# Altium PCB STM32_FYP_ADC_Module.PcbDoc
Units mm, origin at the board's own origin, x right, y up, seen from the top; angles counter-clockwise.
Board outline 70 x 32 mm, 2 copper layers (Top Layer, Bottom Layer); 12 components, 26 nets, 80 pads, 134 vias.
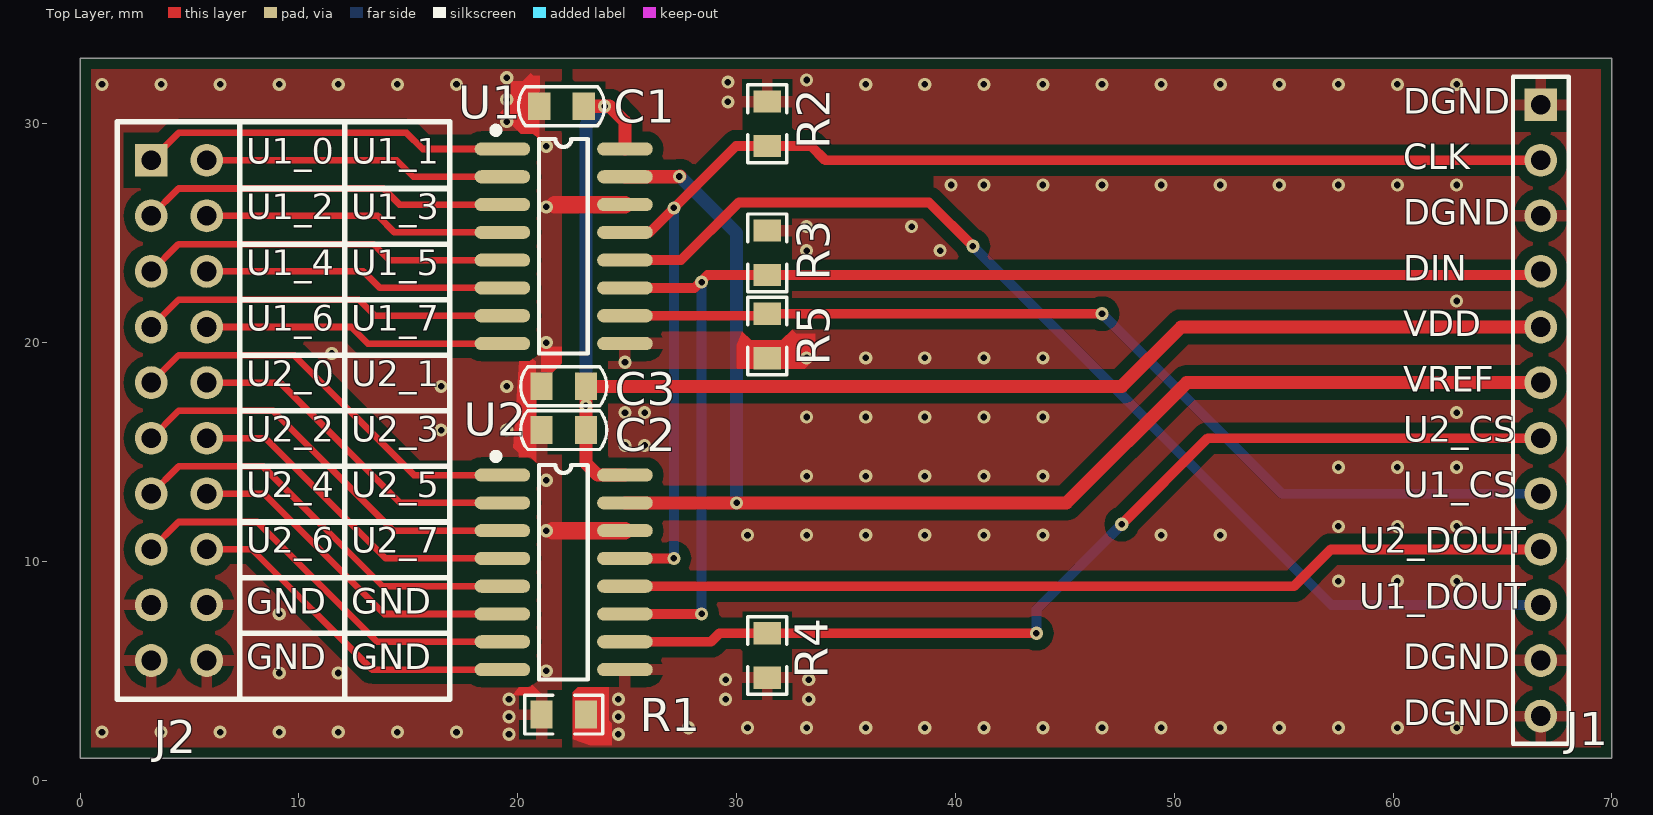
[diagram p0: Top Layer view]
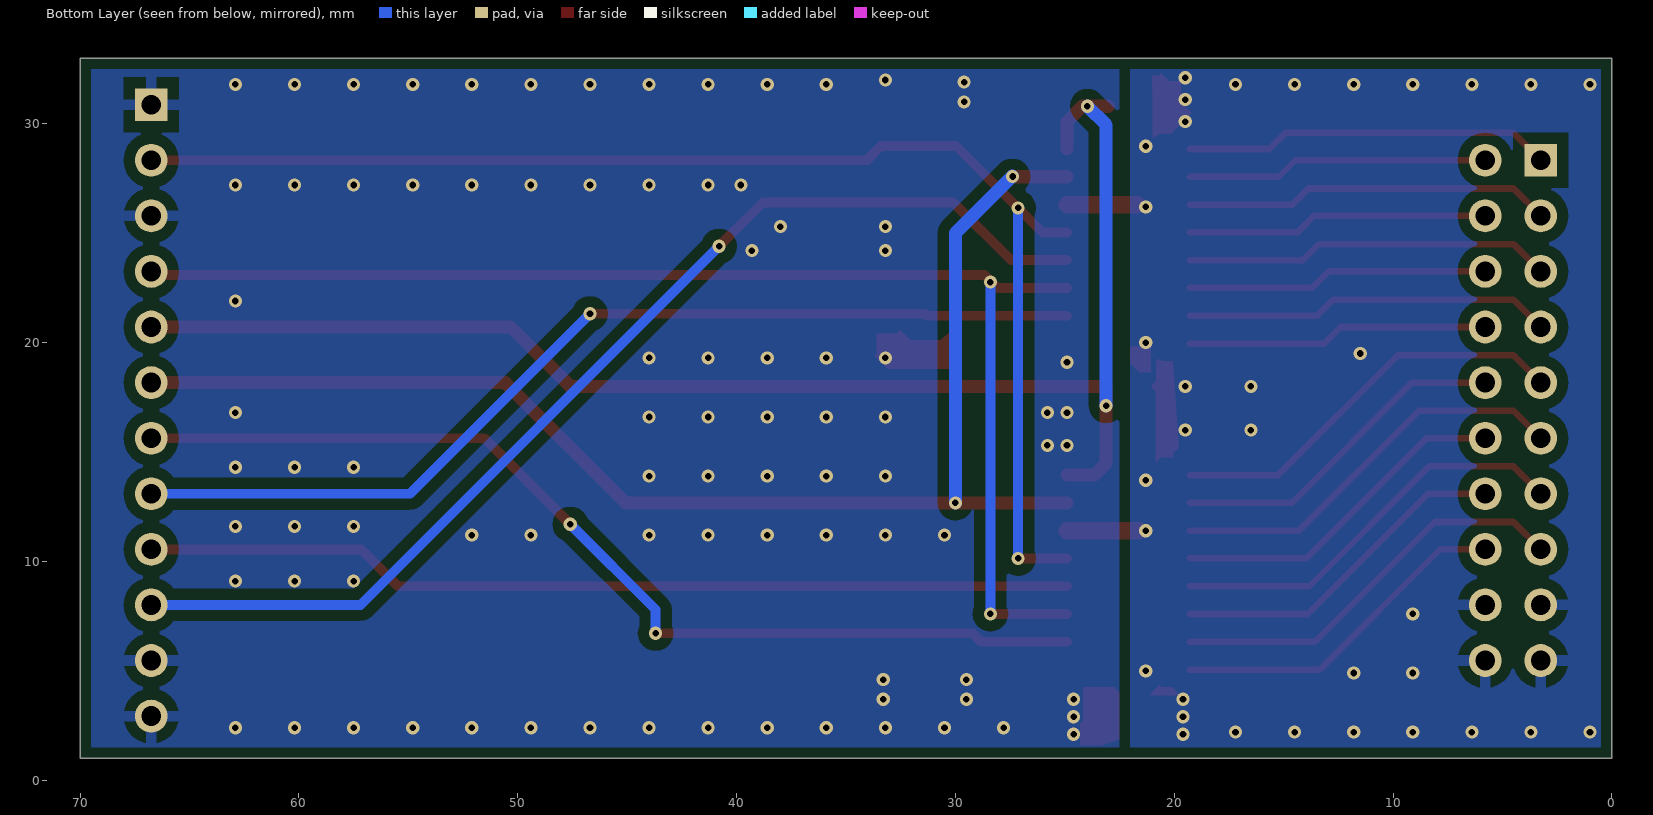
[diagram p1: Bottom Layer view, seen from below]
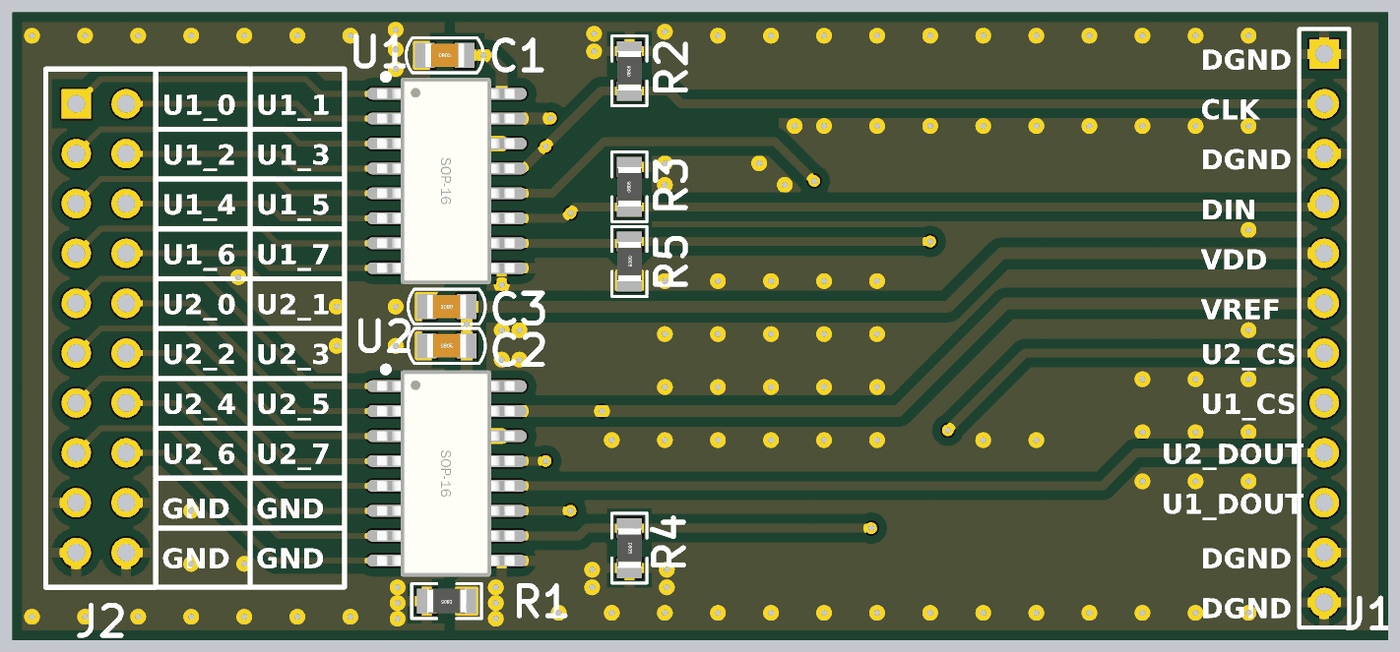
[diagram p2: 3D render of the assembled board from above, using the file's embedded part models]

## Layer stack, top to bottom
Top Solder: solder mask 0.0102, Solder Resist, Dk 3.5
Top Layer: signal copper 0.0356
Dielectric 1: dielectric 0.32, FR-4, Dk 4.8
Bottom Layer: signal copper 0.0356
Bottom Solder: solder mask 0.0102, Solder Resist, Dk 3.5

## Board outline
0,1 70,1 70,33 0,33

## Design rules (kind name [scope] priority, off if disabled: settings)
Clearance Clearance_1 [All vs InPolygon] p1: gap=0.5 ignorepadtopadclearanceinfootprint=FALSE except(0: Arc-Hole Track-Hole SMDPad-Hole THPad-Hole Via-Hole Fill-Hole Poly-Hole Region-Hole Text-Hole)
Clearance [All] p2: gap=0.3 ignorepadtopadclearanceinfootprint=FALSE
ComponentClearance [All] p1: gap=-5 collisioncheckmode=3 verticalgap=0.254 showdistances=FALSE
FabricationTestPointUsage TestPointUsage [All] p1: valid=0 allowmultiple=FALSE
FabricationTestpoint Testpoint [(IsPad And (OnTopLayer Or OnBottomLayer))] p1: side=3 testpointundercomponent=TRUE minsize=1.016 maxsize=2.54 preferedsize=1.524 minholesize=0 maxholesize=1.016 preferedholesize=0.813 testpointgrid=0.025 allowsidetop=TRUE allowsidebottom=TRUE usegrid=TRUE gridtolerance=0
HoleSize [All] p1: absolutevalues=TRUE maxlimit=10 minlimit=0.025 maxpercent=80.000 minpercent=20.000
HoleToHoleClearance [All] p1: gap=0 allowstackedmicrovias=TRUE
MinimumSolderMaskSliver [All] p1: minsoldermaskwidth=0
NetAntennae [All] p1 off: netantennaetolerance=0
PlaneConnect [All] p1: planeconnectstyle=Direct reliefexpansion=0.508 reliefentries=4 reliefconductorwidth=0.254 reliefairgap=0.254
PolygonConnect IsVia [All vs IsVia] p1: connectstyle=Direct reliefconductorwidth=0.508 reliefentries=4 polygonreliefangle="90 Angle" airgapwidth=0.254
PolygonConnect PolygonConnect_1 [All] p2: connectstyle=Relief reliefconductorwidth=0.508 reliefentries=4 polygonreliefangle="90 Angle" airgapwidth=0.5
RoutingVias [All] p1: holewidth=0.4 width=0.7 viastyle="Through Hole" minholewidth=0.3 minwidth=0.6 maxholewidth=1.2 maxwidth=2
SilkToSilkClearance [All] p1: silktosilkclearance=0
SilkToSolderMaskClearance [IsPad] p1: minsilkscreentomaskgap=0 clearancetoexposedcopper=TRUE
SolderMaskExpansion [All] p1: expansion=0.102 istentingtop=FALSE
Width [All] p1: maxlimit=10 minlimit=0.2 preferedwidth=0.6
20 further rules are at their usual default settings.

## Components (designator, comment, footprint, x,y, rotation, side; value= is the part's Value field where it differs from the comment)
C1 "1uF" 0805C_M 22,30.801 r0 top value=0.1uF
C2 "1uF" 0805C_M 22.1,16.001 r0 top value=0.1uF
C3 "0.1uF" 0805C_M 22.1,18.001 r180 top
J1 "Header12" 12P-2.54-H 66.75,30.871 r270 top
J2 "Header10x2" "10PX2-2.54 - H" 4.52,16.901 r270 top
R1 "10R" 0805R_M 22.1,3.001 r180 top
R2 "1M" 0805R_M 31.4,30.001 r90 top
R3 "1M" 0805R_M 31.4,24.101 r90 top
R4 "1M" 0805R_M 31.4,5.7 r270 top
R5 "1M" 0805R_M 31.4,20.3 r270 top
U1 "MCP3008-I/SL" SOIC-16_150mil 22.1,24.401 r0 top
U2 "MCP3008-I/SL" SOIC-16_150mil 22.1,9.501 r0 top

## Footprints (in the part's own frame and the unit in brackets; to place one, negate y for a bottom-side part, rotate by r counter-clockwise, add the part's x,y. Pads: shape width x height; smd on the part's side, far side on the other; paste and mask are expansions set on the pad)
"10PX2-2.54 - H" [mm]
  rect 1.5x1.5 hole 0.9: 1(-11.43,-1.27)
  round 1.5 hole 0.9: 2(-11.43,1.27) 3(-8.89,-1.27) 4(-8.89,1.27) 5(-6.35,-1.27) 6(-6.35,1.27) 7(-3.81,-1.27) 8(-3.81,1.27) 9(-1.27,-1.27) 10(-1.27,1.27) 11(1.27,-1.27) 12(1.27,1.27) 13(3.81,-1.27) 14(3.81,1.27) 15(6.35,-1.27) 16(6.35,1.27) 17(8.89,-1.27) 18(8.89,1.27) 19(11.43,-1.27) 20(11.43,1.27)
  silkscreen extent -13.2,-2.82 13.2,2.78
12P-2.54-H [mm] "Connector; Header; 12Position"
  rect 1.5x1.5 hole 0.9: 1(0,0)
  round 1.5 hole 0.9: 2(2.54,0) 3(5.08,0) 4(7.62,0) 5(10.16,0) 6(12.7,0) 7(15.24,0) 8(17.78,0) 9(20.32,0) 10(22.86,0) 11(25.4,0) 12(27.94,0)
  silkscreen extent -1.27,-1.27 29.21,1.27
0805C_M [mil] "Chip Capacitance, Body 2.0x1.2mm, IPC Low Density"
  rect 40x50 smd: 1(-40,0) 2(40,0)
  silkscreen extent -78,-35 78,35, body extent -39,-24 39,24, height 20
0805R_M [mil] "Chip Resistor, Body 2.0x1.2mm, IPC Low Density"
  rect 40x50 smd: 1(-40,0) 2(40,0)
  silkscreen extent -70,-35 70,35, body extent -39,-25 39,25, height 20
SOIC-16_150mil [mm] "SOIC, 16-Leads, Body 9.9x3.8mm (max), Pitch 1.27mm"
  oval 2.54x0.6 smd: 1(-2.8,4.445) 2(-2.8,3.175) 3(-2.8,1.905) 4(-2.8,0.635) 5(-2.8,-0.635) 6(-2.8,-1.905) 7(-2.8,-3.175) 8(-2.8,-4.445) 9(2.8,-4.445) 10(2.8,-3.175) 11(2.8,-1.905) 12(2.8,-0.635) 13(2.8,0.635) 14(2.8,1.905) 15(2.8,3.175) 16(2.8,4.445)
  silkscreen extent -3.25,-4.9 1.1,5.45, body extent -3.54,-5.25 3.46,5.25, height 1.9

## Part data
C1 C2 C3: library part Cap, "无极性电容", LatestRevisionDate=17-Jul-2002, LatestRevisionNote="Re-released for DXP Platform.", PackageDescription="Radial Cap, Thru-Hole; 2 Leads; 0.3 in Pin Spacing", PackageReference=RAD-0.3, Published=8-Jun-2000, Publisher="Altium Limited"
J1: "12PIN插座"
R1 R2 R3 R4 R5: library part Res, "电阻", LatestRevisionDate=17-Jul-2002, LatestRevisionNote="Re-released for DXP Platform.", PackageDescription="Axial Device, Thru-Hole; 2 Leads; 0.4 in Pin Spacing", PackageReference=AXIAL-0.4, Published=8-Jun-2000, Publisher="Altium Limited"
U1 U2: library part MCP3008, "ADC模数转换芯片"

## Via types
v1: diameter 0.6, hole 0.3, Top Layer to Bottom Layer, 134 vias

## Nets (pads, with @x,y where several pads share a name; then routed paths per layer and width w, separated by ;. In a path a pad name is that pad's centre, name@x,y a point inside that pad or via, vN(x,y) a via of type N, cw(c..) or ccw(c..) an arc to the next point about the centre after c; other vN are vias at no path point)
CLK: J1.2 R2.1 U1.13 U2.13 | length 62
  Top Layer w0.45: U2.13 v1(27.136,10.136) ; U1.13 26.018,25.036 29.967,28.985 R2.1 33.397,28.985 34.051,28.331 J1.2
  Bottom Layer w0.45: v1(27.136,10.136) v1(27.136,26.154)
DGND: J1.1 J1.3 J1.11 J1.12 R1.1 R2.2 R3.2 R4.2 R5.2 U1.9 U2.9
  other v1: 24.6,2.1 27.8,2.4 30.5,2.4 33.2,2.4 35.9,2.4 38.6,2.4 41.3,2.4 44,2.4 46.7,2.4 49.4,2.4 52.1,2.4 54.8,2.4 57.5,2.4 60.2,2.4 62.9,2.4 24.6,2.9 24.6,3.7 29.5,3.7 33.3,3.7 29.5,4.6 33.3,4.6 57.5,9.1 60.2,9.1 62.9,9.1 30.5,11.2 33.2,11.2 35.9,11.2 38.6,11.2 41.3,11.2 44,11.2 49.4,11.2 52.1,11.2 57.5,11.6 60.2,11.6 62.9,11.6 33.2,13.9 35.9,13.9 38.6,13.9 41.3,13.9 44,13.9 57.5,14.3 60.2,14.3 62.9,14.3 24.9,15.3 25.8,15.3 33.2,16.6 35.9,16.6 38.6,16.6 41.3,16.6 44,16.6 24.9,16.8 25.8,16.8 62.9,16.8 24.9,19.1 33.2,19.3 35.9,19.3 38.6,19.3 41.3,19.3 44,19.3 62.9,21.9 33.2,24.2 39.3,24.2 33.2,25.3 38,25.3 39.8,27.2 41.3,27.2 44,27.2 46.7,27.2 49.4,27.2 52.1,27.2 54.8,27.2 57.5,27.2 60.2,27.2 62.9,27.2 29.6,31 35.9,31.8 38.6,31.8 41.3,31.8 44,31.8 46.7,31.8 49.4,31.8 52.1,31.8 54.8,31.8 57.5,31.8 60.2,31.8 62.9,31.8 29.6,31.9 33.2,32
DIN: J1.4 R3.1 U1.11 U2.11 | length 60.8
  Top Layer w0.45: U2.11 24.904,7.6 v1(28.4,7.6) ; U1.11 28.078,22.496 28.667,23.085 R3.1 66.584,23.085 J1.4
  Bottom Layer w0.45: v1(28.4,7.6) v1(28.4,22.763)
GND: C1.1 C2.1 C3.2 J2.17 J2.18 J2.19 J2.20 R1.2 U1.14 U2.14 | length 6.5
  Top Layer w0.8: v1@21.594,11.406 U2.14 ; 21.694,26.306 U1.14
  other v1: 19.6,2.1 1,2.2 3.7,2.2 6.4,2.2 9.1,2.2 11.8,2.2 14.5,2.2 17.2,2.2 19.6,2.9 19.6,3.7 9.1,4.9 11.8,4.9 21.3,5 9.1,7.6 21.3,11.4 21.3,13.706 16.5,16 19.5,16 16.5,18 19.5,18 11.5,19.5 21.3,20 21.3,26.2 21.3,28.971 19.5,30.1 19.5,31.1 1,31.8 3.7,31.8 6.4,31.8 9.1,31.8 11.8,31.8 14.5,31.8 17.2,31.8 19.5,32.1
U1_CH0: J2.1 U1.1 | length 16.9
  Top Layer w0.3: J2.1 4.499,29.58 14.92,29.58 15.654,28.846 U1.1
U1_CH1: J2.2 U1.2 | length 13.8
  Top Layer w0.3: J2.2 14.469,28.331 15.224,27.576 U1.2
U1_CH2: J2.3 U1.3 | length 16.9
  Top Layer w0.3: J2.3 4.499,27.04 13.86,27.04 14.594,26.306 U1.3
U1_CH3: J2.4 U1.4 | length 13.8
  Top Layer w0.3: J2.4 13.609,25.791 14.364,25.036 U1.4
U1_CH4: J2.5 U1.5 | length 16.9
  Top Layer w0.3: J2.5 4.499,24.5 13.4,24.5 14.134,23.766 U1.5
U1_CH5: J2.6 U1.6 | length 13.8
  Top Layer w0.3: J2.6 12.949,23.251 13.704,22.496 U1.6
U1_CH6: J2.7 U1.7 | length 16.9
  Top Layer w0.3: J2.7 4.499,21.96 12.74,21.96 13.474,21.226 U1.7
U1_CH7: J2.8 U1.8 | length 13.8
  Top Layer w0.3: J2.8 12.389,20.711 13.144,19.956 U1.8
U1_CS: J1.8 R5.1 U1.10 | length 45.3
  Top Layer w0.45: U1.10 31.31,21.226 R5.1 v1(46.7,21.316)
  Bottom Layer w0.45: v1(46.7,21.316) 54.925,13.091 J1.8
U1_DOUT: J1.10 U1.12 | length 50.6
  Top Layer w0.45: U1.12 27.466,23.766 30.1,26.4 38.8,26.4 v1(40.8,24.4)
  Bottom Layer w0.45: v1(40.8,24.4) 57.189,8.011 J1.10
U2_CH0: J2.9 U2.1 | length 18.8
  Top Layer w0.3: J2.9 4.499,19.42 9.78,19.42 15.254,13.946 U2.1
U2_CH1: J2.10 U2.2 | length 15.8
  Top Layer w0.3: J2.10 9.129,18.171 14.624,12.676 U2.2
U2_CH2: J2.11 U2.3 | length 18.8
  Top Layer w0.3: J2.11 4.499,16.88 8.82,16.88 14.294,11.406 U2.3
U2_CH3: J2.12 U2.4 | length 15.8
  Top Layer w0.3: J2.12 8.469,15.631 13.964,10.136 U2.4
U2_CH4: J2.13 U2.5 | length 18.8
  Top Layer w0.3: J2.13 4.499,14.34 8.36,14.34 13.834,8.866 U2.5
U2_CH5: J2.14 U2.6 | length 15.8
  Top Layer w0.3: J2.14 8.409,13.091 13.904,7.596 U2.6
U2_CH6: J2.15 U2.7 | length 18.8
  Top Layer w0.3: J2.15 4.499,11.8 8.1,11.8 13.574,6.326 U2.7
U2_CH7: J2.16 U2.8 | length 15.8
  Top Layer w0.3: J2.16 7.849,10.551 13.344,5.056 U2.8
U2_CS: J1.7 R4.1 U2.10 | length 46.3
  Top Layer w0.45: U2.10 28.826,6.326 29.216,6.716 R4.1 v1(43.7,6.716) ; v1(47.6,11.7) 51.531,15.631 J1.7
  Bottom Layer w0.45: v1(43.7,6.716) 43.7,7.8 v1(47.6,11.7)
U2_DOUT: J1.9 U2.12 | length 42.5
  Top Layer w0.45: U2.12 55.466,8.866 57.151,10.551 J1.9
VDD: C1.2 C2.2 C3.1 J1.5 U1.16 U2.16 | length 67.8
  Top Layer w0.6: C1.2 v1(23.969,30.801) 24.199,30.801 24.9,30.1 U1.16 ; U2.16 23.646,13.946 23.116,14.476 C2.2 v1(23.116,17.112) C3.1 47.601,18.001 50.311,20.711 J1.5
  Bottom Layer w0.6: v1(23.116,17.112) 23.116,29.949 v1(23.969,30.801)
VREF: J1.6 U1.15 U2.15 | length 62.6
  Top Layer w0.6: U2.15 v1(30,12.676) 45.076,12.676 50.571,18.171 J1.6 ; U1.15 27.376,27.576 v1@27.4,27.6
  Bottom Layer w0.6: v1@27.4,27.6 30,25 v1(30,12.676)
  other v1: 27.388,27.588

## Polygon pours and split planes (outlines as drawn)
DGND on Bottom Layer "NONET_L-01_P-001" (solid, remove dead copper, pour order 3): 22.5,1.5 22.5,32.5 69.5,32.5 69.5,1.5
GND on Bottom Layer "NONET_L-01_P-001" (solid, remove dead copper, pour order 0): 0.5,32.5 22,32.5 22,1.5 0.5,1.5
DGND on Top Layer "NONET_L-01_P-001" (solid, remove dead copper, pour order 2): 22.5,1.5 22.5,32.5 69.5,32.5 69.5,1.5
GND on Top Layer "NONET_L-01_P-001" (solid, remove dead copper, pour order 1): 0.5,32.5 22,32.5 22,1.5 0.5,1.5

## Other copper
Top Layer:
  region net DGND: 22.51,1.866 22.51,4.01 22.749,4.249 24.158,4.249 24.158,2.742 24.3,2.6 24.3,1.6 23.3,1.6
  pour cut-out: 39,26.9 39,27.9 38.9,28 37.9,28 37.9,27
  region net DGND: 30.265,20.495 30.66,20.1 32.05,20.1 32.535,20.585 32.72,20.4 33.6,20.4 33.6,19.5 33.7,19.4 33.108,18.808 30.03,18.808 30,18.838 30,19.884
  region net GND: 20.042,4.249 20.565,4.249 20.673,4.357 21.069,3.961 21.069,3.89 19.81,3.89 19.8,3.9
  region net GND: 20.68,29.552 20.148,29.552 19.2,30.5 19.7,31 19.7,31.936 20.236,31.936 20.6,32.3 20.7,32.2 21,32.2 21,31.452 20.982,31.434 20.982,29.303
  region net GND: 21.592,18.636 22,19.044 22,19.8 21.233,19.8 21.084,19.949 21.084,18.636
  region net GND: 20.076,19.136 20.554,19.136 20.681,19.263 20.808,19.136 20.83,19.136 20.83,18.255 21.084,18.001 20.841,17.758 20.841,14.517 20.604,14.753 20.042,14.753 20.042,14.958 19.8,15.2
  pour cut-out: 23.7,5.7 23.7,4.497 23.539,4.336 22.51,4.336 22.51,5.39 22.2,5.7
  pour cut-out: 23.7,20.5 23.7,19.297 23.539,19.136 22.51,19.136 22.51,20.19 22.2,20.5

## Silkscreen, mask and mechanical layers (free items; w line width, h text height)
Top Overlay:
  lines w0.254: 7.3,6.72 16.877,6.72 ; 7.3,9.26 16.877,9.26 ; 7.3,11.8 16.877,11.8 ; 7.3,14.34 16.877,14.34 ; 7.3,16.88 16.877,16.88 ; 7.3,19.42 16.877,19.42 ; 7.3,21.96 16.877,21.96 ; 7.3,24.5 16.877,24.5 ; 7.3,27.04 16.877,27.04 ; 7.3,30.101 16.896,30.101 16.896,3.702 ; 7.31,3.709 16.887,3.709 ; 12.098,3.702 12.098,30.101
  text "DGND" at 60.46,30.072 h2
  text "U1_0" at 7.601,27.776 h2
  text "U1_1" at 12.4,27.776 h2
  text "CLK" at 60.461,27.539 h2
  text "U1_2" at 7.601,25.236 h2
  text "U1_3" at 12.4,25.236 h2
  text "DGND" at 60.46,24.992 h2
  text "U1_4" at 7.601,22.696 h2
  text "U1_5" at 12.4,22.696 h2
  text "DIN" at 60.46,22.437 h2
  text "U1_6" at 7.601,20.156 h2
  text "U1_7" at 12.4,20.156 h2
  text "VDD" at 60.461,19.897 h2
  text "U2_0" at 7.601,17.616 h2
  text "U2_1" at 12.4,17.616 h2
  text "VREF" at 60.461,17.357 h2
  text "U2_2" at 7.601,15.076 h2
  text "U2_3" at 12.4,15.076 h2
  text "U2_CS" at 60.461,15.076 h2
  text "U2_4" at 7.601,12.536 h2
  text "U2_5" at 12.4,12.536 h2
  text "U1_CS" at 60.461,12.536 h2
  text "U2_6" at 7.601,9.996 h2
  text "U2_7" at 12.4,9.996 h2
  text "U2_DOUT" at 58.461,9.996 h2
  text "U1_DOUT" at 58.461,7.456 h2
  text "GND" at 7.6,7.212 h2
  text "GND" at 12.398,7.212 h2
  text "GND" at 7.6,4.672 h2
  text "GND" at 12.398,4.672 h2
  text "DGND" at 60.46,4.672 h2
  text "DGND" at 60.46,2.132 h2
Mechanical 1:
  the board outline again, w0.254